# Altium PCB PCB.PcbDoc
Units mm, origin at the board's own origin, x right, y up, seen from the top; angles counter-clockwise.
Board outline 81.15 x 38.73 mm, 2 copper layers (Top Layer, Bottom Layer); 25 components, 20 nets, 91 pads, 0 vias.
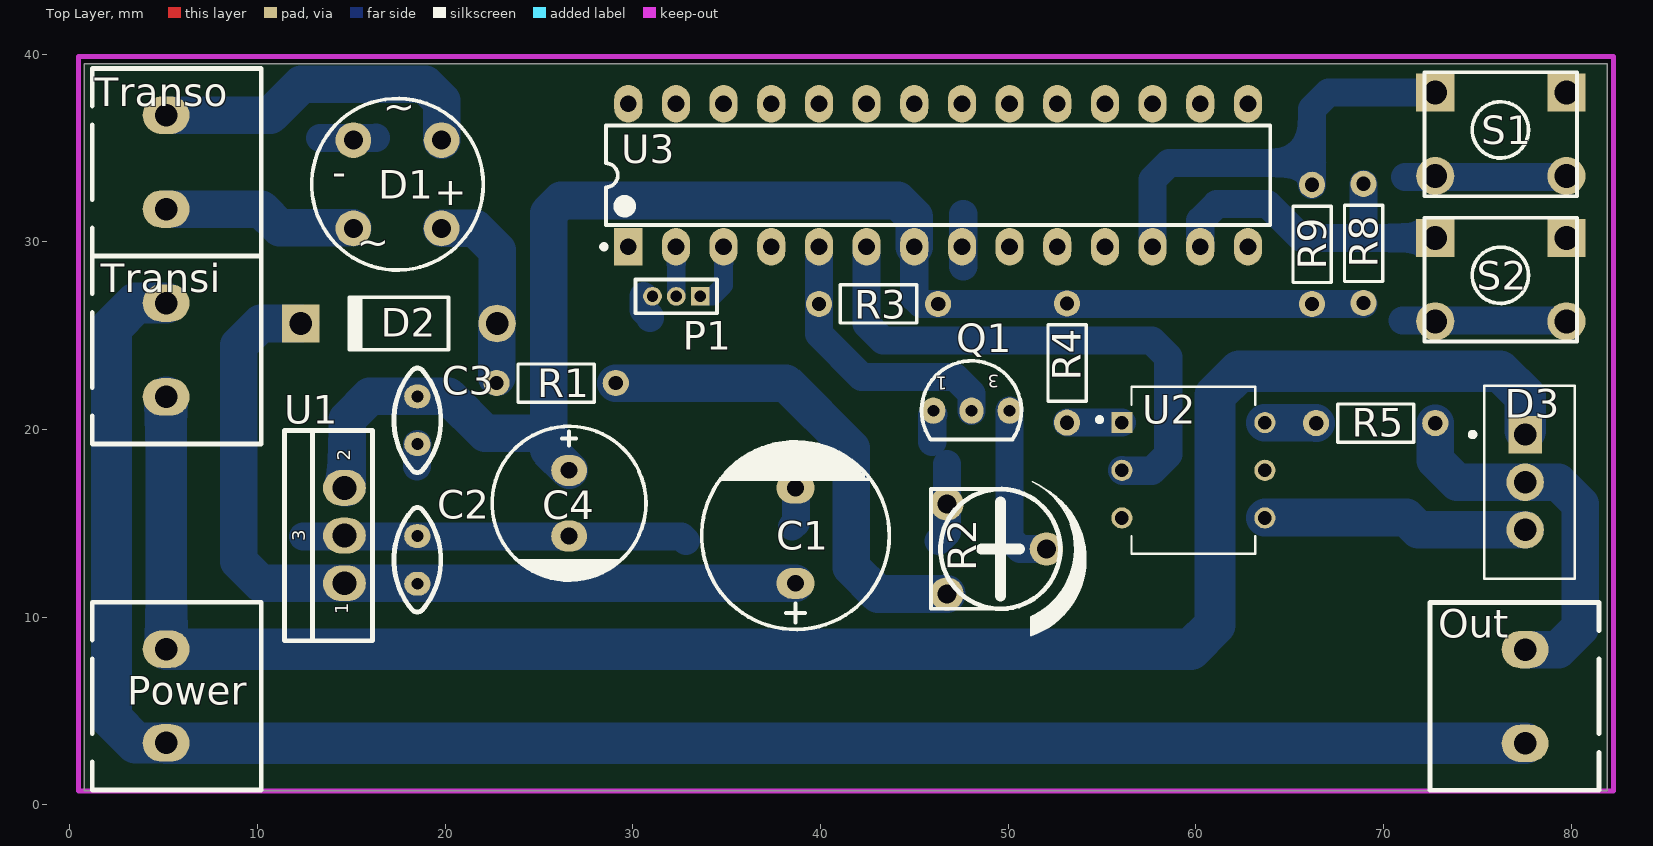
[diagram p0: Top Layer view]
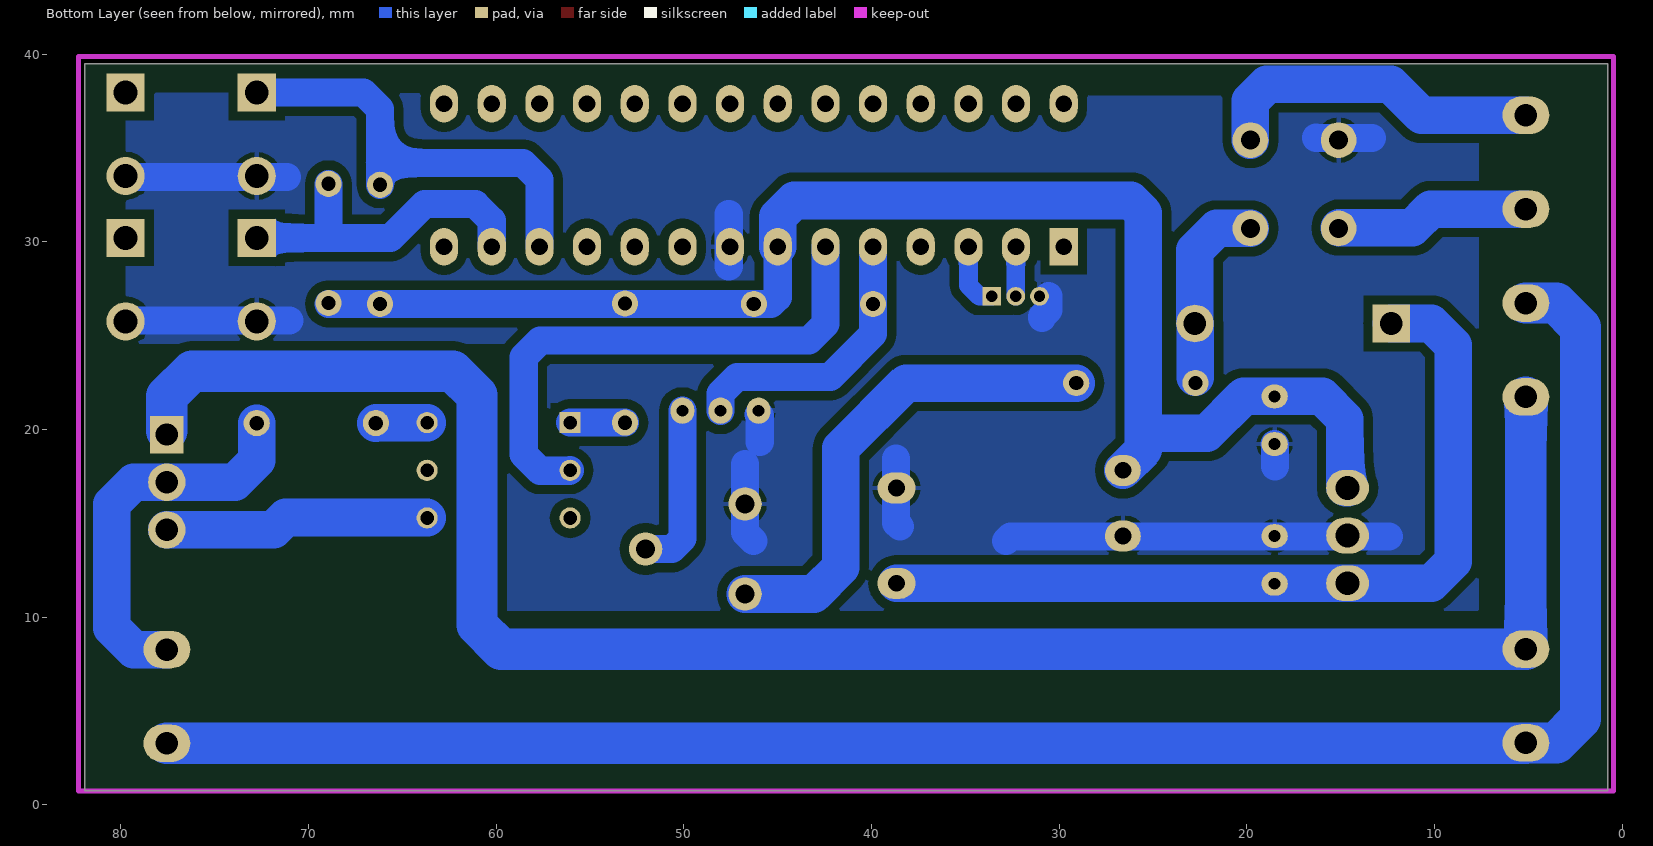
[diagram p1: Bottom Layer view, seen from below]
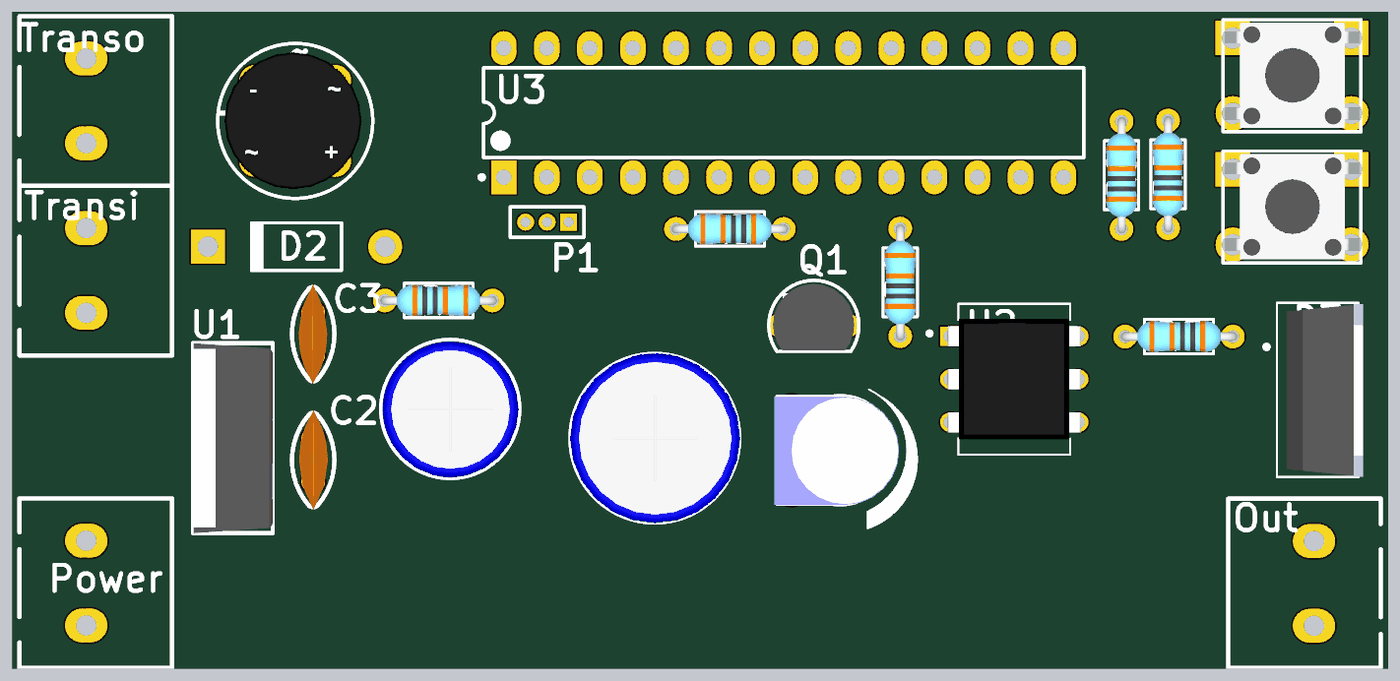
[diagram p2: 3D render of the assembled board from above, using the file's embedded part models]

## Layer stack, top to bottom
Top Solder: solder mask 0.0102, Solder Resist, Dk 3.5
Top Layer: signal copper 0.0356
Dielectric 1: dielectric 0.32, FR-4, Dk 4.8
Bottom Layer: signal copper 0.0356
Bottom Solder: solder mask 0.0102, Solder Resist, Dk 3.5

## Board outline
0.762,39.497 0.762,0.762 81.915,0.762 81.915,39.497

## Design rules (kind name [scope] priority, off if disabled: settings)
Clearance [All] p1: gap=0.5 ignorepadtopadclearanceinfootprint=FALSE
PolygonConnect [All] p1: connectstyle=Relief reliefconductorwidth=0.254 reliefentries=4 polygonreliefangle="90 Angle" airgapwidth=0.254
RoutingVias [All] p1: holewidth=0.711 width=1.27 viastyle="Through Hole" minholewidth=0.711 minwidth=1.27 maxholewidth=0.711 maxwidth=1.27
SolderMaskExpansion [All] p1: expansion=0.102 istentingtop=FALSE
Width [All] p1: maxlimit=1.5 minlimit=1.5 preferedwidth=1.5
30 further rules are at their usual default settings.

## Components (designator, comment, footprint, x,y, rotation, side; value= is the part's Value field where it differs from the comment)
C1 "1000uF" "cap 04" 38.659,14.351 r270 top
C2 "100nF" "Cap - 100nF" 18.51,13.056 r90 top
C3 "100nF" "Cap - 100nF" 18.51,20.498 r270 top
C4 "100uF" "cap 03" 26.594,16.076 r90 top
D1 "Diode Bridge" Bridge 17.45,33.071 r180 top
D2 "Diode 1N4007" DO-41 17.526,25.654 r180 top
D3 "BTA16" *TO254P1028X482X1968-3 77.54,19.736 r270 top
Out "Terminal" "Terminal 1*2" 81.477,0.787 r90 top
P1 "MHDR1X3" MHDR1X3 33.579,27.102 r180 top
Power "Terminal" "Terminal 1*2" 1.187,10.795 r270 top
Q1 "BC639" C945 48.038,21.006 r180 top
R1 "2.2K" Res-(1/4) 25.908,22.479 r0 top
R2 "10K" "Pot 00" 49.378,13.64 r270 top
R3 "10K" Res-(1/4) 43.085,26.695 r180 top
R4 "36" Res-(1/4) 53.13,23.546 r90 top
R5 "270" Res-(1/4) 69.577,20.345 r180 top
R8 "10K" Res-(1/4) 68.929,29.921 r90 top
R9 "10K" Res-(1/4) 66.186,29.87 r90 top
S1 "Switch PB" "Switch - Push to On" 76.244,35.738 r0 top
S2 "Switch PB" "Switch - Push to On" 76.244,27.991 r0 top
Transi "Terminal" "Terminal 1*2" 1.187,29.235 r270 top
Transo "Terminal" "Terminal 1*2" 1.187,39.247 r270 top
U1 "L7805" 78XXCV 14.624,14.351 r90 top
U2 "MOC3021" *DIP762W45P254L889H508Q6 59.861,17.831 r0 top
U3 "ATmega8" 28P3 46.26,33.553 r90 top

## Footprints (in the part's own frame and the unit in brackets; to place one, negate y for a bottom-side part, rotate by r counter-clockwise, add the part's x,y. Pads: shape width x height; smd on the part's side, far side on the other; paste and mask are expansions set on the pad)
28P3 [mm] "DIP, 28-Leads, Row Spacing 7.62mm, Pitch 2.54mm, Body 34.67x7.3mm"
  rect 2x1.5 hole 0.9: 1(-3.81,16.51)
  oval 2x1.5 hole 0.9: 2(-3.81,13.97) 3(-3.81,11.43) 4(-3.81,8.89) 5(-3.81,6.35) 6(-3.81,3.81) 7(-3.81,1.27) 8(-3.81,-1.27) 9(-3.81,-3.81) 10(-3.81,-6.35) 11(-3.81,-8.89) 12(-3.81,-11.43) 13(-3.81,-13.97) 14(-3.81,-16.51) 15(3.81,-16.51) 16(3.81,-13.97) 17(3.81,-11.43) 18(3.81,-8.89) 19(3.81,-6.35) 20(3.81,-3.81) 21(3.81,-1.27) 22(3.81,1.27) 23(3.81,3.81) 24(3.81,6.35) 25(3.81,8.89) 26(3.81,11.43) 27(3.81,13.97) 28(3.81,16.51)
  silkscreen extent -3.93,-17.7 2.65,17.93, body extent -3.6,-17.65 3.6,17.65, height 4.58
78XXCV [mil]
  oval 75x90 hole 50: 1(-100,0) 2(100,0) 3(0,0)
  silkscreen extent -221,-59 221,126, body extent -221,-59 221,126, height 781
*DIP762W45P254L889H508Q6 [mm]
  rect 1.13x1.13 hole 0.73: 1(-3.81,2.54)
  round 1.13 hole 0.73: 2(-3.81,0) 3(-3.81,-2.54) 4(3.81,-2.54) 5(3.81,0) 6(3.81,2.54)
  silkscreen extent -5.12,-4.45 3.3,4.45, body extent -3.94,-3.56 3.94,3.56, height 4.59
*TO254P1028X482X1968-3 [mm]
  rect 2x1.792 hole 1.19: 1(0,0)
  round 2 hole 1.19: 2(2.54,0) 3(5.08,0)
  silkscreen extent -2.6,-2.9 7.68,2.64, body extent -2.54,-1.61 7.66,2.88, height 19.31
Bridge [mm]
  round 1.905 hole 1.016: 1(-2.35,2.35) 2(-2.35,-2.35) 3(2.35,-2.35) 4(2.35,2.35)
  silkscreen extent -4.57,-4.57 4.57,4.57, body extent -3.92,-4.06 4.18,4.04, height 5.21
C945 [mil] "NPN Transistor"
  oval 50x55 hole 25: 1(80,0) 2(0,0) 3(-80,0)
  silkscreen extent -105,-105 105,61, body extent -94,-96 95,58, height 315
"cap 03" [mil]
  oval 65x75 hole 35: 1(68.9,0) 2(-68.9,0)
  silkscreen extent -161,-161 161,161, body extent -159,-159 157,158, height 473
"cap 04" [mil]
  oval 65x80 hole 35: 1(100,0) 2(-100,0)
  silkscreen extent -197,-197 197,197, body extent -198,-197 198,199, height 513
"Cap - 100nF" [mil]
  oval 50x55 hole 25: 1(-50,0) 2(50,0)
  silkscreen extent -110,-49 110,49, body extent -115,-34 115,33, height 272
DO-41 [mm] "Diode, Axial; Body 5.2 x 2.7 mm (LxDia. max), Lead Dia. 0.86 mm (max)"
  round 2 hole 1.2: 1(-5.23,0)
  rect 2x2 hole 1.2: 2(5.23,0)
  silkscreen extent -2.65,-1.4 2.75,1.4
MHDR1X3 [mm] "Connector; Header; 3 Position"
  rect 1x1 hole 0.6: 1(0,0)
  round 1 hole 0.6: 2(1.27,0) 3(2.54,0)
  silkscreen extent -0.9,-0.9 3.44,0.9
"Pot 00" [mil]
  round 70 hole 40: 1(-94.49,-104.33) 2(94.49,-104.33) 3(0,104.33)
  silkscreen extent -141,-138 181,187, body extent -125,-144 127,145, height 183
Res-(1/4) [mil]
  round 55 hole 30: 1(-125,0) 2(125,0)
  silkscreen extent -80,-40 80,40, body extent -135,-36 135,36, height 115
"Switch - Push to On" [mil]
  rect 80x80 hole 50: 1(-137.5,87.5) 1(137.5,87.5)
  round 80 hole 50: 2(-137.5,-87.5) 2(137.5,-87.5)
  silkscreen extent -160,-130 160,130, body extent -155,-121 157,123, height 205
"Terminal 1*2" [mm]
  oval 2x2.5 hole 1.2: 1(2.493,3.937) 2(7.493,3.937)
  silkscreen extent 0,0 10,9

## Part data
C1 C4: library part Cap-Polar, "Polar Capacitor", Voltage=25V, Adding Date=1387/12/20, Designer="Saeid Jorablo", Organazation=ControTec
C2 C3: library part Cap-Bipolar, "Bipolar Capacitor", Voltage=100V, Adding Date=1387/12/20, Designer="Saeid Jorablo", Organazation=ControTec
D1: "Full Wave Diode Bridge", Company=E.P.I.L, Design Date=2011/11/02
D2: "1 Amp General Purpose Rectifier", Code_JEDEC=DO-204-AL, ComponentLink1Description="Manufacturer Link", ComponentLink1URL=http://www.fairchildsemi.com/, ComponentLink2Description=Datasheet, ComponentLink2URL=http://www.fairchildsemi.com/ds/1N%2F1N4001.pdf, DatasheetVersion=1998, LatestRevisionDate=17-Jul-2002, LatestRevisionNote="Re-released for DXP Platform.", PackageDescription="Diode, Axial; Body 5.2 x 2.7 mm (LxDia. max), Lead Dia. 0.86 mm (max)", PackageReference=DO-41, PackageVersion=Aug-1999, Published=8-Jun-2000, Publisher="Altium Limited"
D3: library part BTA16-600CW3G, "Thyristor TRIAC 600V 170A 3-Pin_3+Tab_ TO-220AB Tube", Package="TO-220 Littelfuse", Availability=Unavailable, MF="Littelfuse Inc.", MP=BTA16-600CW3G, Price=None, SnapEDA_Link=https://www.snapeda.com/parts/BTA16-600CW3G/Littelfuse%20Inc./view-part/?ref=snap
Out Power Transi Transo: library part "Terminal 1*2", "Terminal 2 Pin 250VAC 16A", ComponentLinkURL=www.picpars.com, Designer="Seyed Mohsen Ghasemain", E-mail=picpars@gmail.com
P1: "Header, 3-Pin", LatestRevisionDate=17-Jul-2002, LatestRevisionNote="Re-released for DXP Platform.", Publisher="Altium Limited"
Q1: library part C945, "NPN Transistor", Company="IPA CO", Designer="Saeid Jorablo", Last Update Time=2008/08/04
R1 R3 R4 R5 R8 R9: library part Resistor, "Resistor", Power="1/8 W", Tolerance=5%
R2: library part "Resistor Variable", "Variable Resistor", Adding Date=137/12/22, Company=ControTec, Designer="Saeid Jorablo"
S1 S2: "Push Button Switch"
U1: library part L78XXCV, "Fixed Voltage Regulator", Adding Date=1387/01/06, Company=ControTec, Designer="Saeid Jorablo"
U2: "Optoisolator Triac Output 5300Vrms 1 Channel 6-DIP", Package="DIP-6 Fujitsu", Availability=Unavailable, MF="ON Semiconductor", MP=MOC3021, Price=None, SnapEDA_Link=https://www.snapeda.com/parts/MOC3021/ON%20Semiconductor/view-part/1666329/?ref=snap
U3: library part ATmega8-16PC, "8-Bit AVR Microcontroller with 8K Bytes of In-System Programmable Flash Memory", Supplier Part Number 1=ATMEGA8-16PC-ND, ComponentLink1Description=Datasheet, ComponentLink1URL=http://www.atmel.com/dyn/resources/prod_documents/doc2486.pdf, ComponentLink2Description="Atmel.com Home", ComponentLink2URL=http://www.atmel.com, DatasheetVersion=2486H-AVR-09/02, PackageDescription="28-lead (0.300\"/7.62mm Wide) Plastic Dual Inline Package (PDIP)", PackageReference=28P3, PackageVersion="revB, Sep-2001", Published=17-Sep-2003, Publisher="Altium Limited", Supplier 1=Digi-Key, Supplier 2=Mouser, Supplier Part Number 2=556-ATMEGA8-16PC

## Nets (pads, with @x,y where several pads share a name; then routed paths per layer and width w, separated by ;. In a path a pad name is that pad's centre, name@x,y a point inside that pad or via, vN(x,y) a via of type N, cw(c..) or ccw(c..) an arc to the next point about the centre after c; other vN are vias at no path point)
12V_L: D1.4 Transo.2 | length 10.4
  Bottom Layer w1.5: D1.4@15.061,30.759 D1.4
  Bottom Layer w2: Transo.2 10.182,31.754 11.176,30.759 D1.4@15.061,30.759
12V_N: D1.2 Transo.1 | length 17.8
  Bottom Layer w2: Transo.1 10.681,36.754 12.319,38.391 18.921,38.391 19.8,37.513 D1.2
220V_L: Out.1 Power.2 Transi.1 | length 100.2
  Bottom Layer w2.2: Transi.1 3.506,26.742 2.218,25.454 2.218,4.591 3.506,3.302 Power.2 5.135,3.291 77.529,3.291 Out.1
220V_N: D3.1 Power.1 Transi.2 | length 101.5
  Bottom Layer w2.2: Transi.2 Power.1 59.722,8.302 61.011,9.591 61.011,21.825 62.3,23.114 76.2,23.114 77.54,21.774 D3.1@77.54,19.939
+5: C3.1 C4.1 R3.1 R4.2 R8.1 R9.1 U1.2 U3.7 | length 78.5
  Bottom Layer w1.5: U3.7 44.99,27.045 45.339,26.695 R3.1 53.13,26.695 R9.1 R8.1@68.929,26.695
  Bottom Layer w2: U1.2 14.72,16.891 14.767,16.939 14.767,20.555 15.98,21.768 20.168,21.768 22.123,19.812 25.502,19.812 ; C4.1 25.502,18.918 25.502,31.532 26.177,32.207 44.111,32.207 44.99,31.329 U3.7
Down: R8.2 S2.1@72.752,30.213 U3.13 | length 17.7
  Bottom Layer w1.5: U3.13 60.23,31.151 61.108,32.029 63.805,32.029 65.621,30.213 69.186,30.213 S2.1@72.752,30.213 ; 68.929,30.47 R8.2
GND: C1.2 C2.2 C3.2 C4.2 D1.3 P1.3 Q1.1 R2.1 S1.2 S2.2 U1.3 U3.8 | length 55.7
  Bottom Layer w1.5: 12.421,14.3 32.578,14.3 32.817,14.061 ; 13.335,35.535 16.287,35.535 16.3,35.548 ; 18.491,18.034 18.491,19.209 C3.2 ; P1.3@30.559,27.102 30.559,26.377 30.912,26.024 30.912,25.959 ; 38.481,14.834 38.684,15.037 38.684,18.466 ; 45.949,19.355 45.949,20.752 Q1.1@46.006,20.809 ; 46.279,14.072 46.736,14.529 46.736,18.161 ; 47.6,28.695 47.6,31.496 ; 71.018,25.806 79.699,25.806 79.737,25.768 ccw(c79.673,25.768) S2.2@79.673,25.832 ; 71.145,33.452 79.673,33.452 79.737,33.515 ccw(c79.699,33.515) S1.2@79.699,33.553
NetC1_1: C1.1 C2.1 D2.2 U1.1 | length 45.4
  Bottom Layer w2: D2.2 10.163,25.654 8.992,24.482 8.992,12.983 10.163,11.811 U1.1 C1.1
NetD1_1: D1.1 D2.1 R1.1 | length 10.2
  Bottom Layer w2: D1.1 21.584,30.721 22.756,29.549 D2.1 22.733,25.631 R1.1@22.733,22.784
NetD3_2: D3.2 Out.2 R5.1 | length 20.7
  Bottom Layer w2: R5.1 72.752,18.367 73.924,17.196 D3.2 79.305,17.196 80.477,16.024 80.477,9.452 79.305,8.28 Out.2
NetD3_3: D3.3 U2.4 | length 14.2
  Bottom Layer w2: U2.4 63.697,15.316 71.196,15.316 71.857,14.656 D3.3
NetP1_1: P1.1 U3.3 | length 3.5
  Bottom Layer w1: P1.1 34.244,27.102 34.83,27.688 U3.3
NetP1_2: P1.2 U3.2 | length 2.6
  Bottom Layer w1: U3.2 32.309,29.724 P1.2
NetQ1_3: Q1.3 R2.3 | length 9
  Bottom Layer w1.5: Q1.3 50.07,14.192 50.622,13.64 R2.3
NetR1_2: R1.2 R2.2 | length 26
  Bottom Layer w2: R1.2 38.151,22.479 41.631,18.999 41.631,12.669 43.06,11.24 R2.2
NetR4_1: R4.1 U2.1 | length 2.9
  Bottom Layer w1.5: R4.1 U2.1
NetR5_2: R5.2 U2.6 | length 2.7
  Bottom Layer w2: U2.6 66.377,20.371 R5.2
Pulse: U2.2 U3.6 | length 28.9
  Bottom Layer w1.5: U3.6 42.45,25.618 43.328,24.74 57.643,24.74 58.522,23.861 58.522,18.684 57.643,17.805 56.077,17.805 U2.2
Trig: Q1.2 R3.2 U3.5 | length 15
  Bottom Layer w1.5: U3.5 R3.2 39.91,25.089 42.189,22.809 47.159,22.809 48.038,21.931 Q1.2
Up: R9.2 S1.1@72.752,37.96 U3.12 | length 23.4
  Bottom Layer w1.5: U3.12 57.69,33.335 58.568,34.214 66.186,34.214 ; R9.2 66.186,34.214 ; S1.1@72.752,37.96 67.065,37.96 66.186,37.082 66.186,34.214
pads on no net: S1.1@79.737,37.96 S2.1@79.737,30.213 U2.3 U2.5 U3.1 U3.4 U3.9 U3.10 U3.11 U3.14 U3.15 U3.16 U3.17 U3.18 U3.19 U3.20 U3.21 U3.22 U3.23 U3.24 U3.25 U3.26 U3.27 U3.28

## Polygon pours and split planes (outlines as drawn)
GND on Bottom Layer "GND_L02_P003" (solid, pour order 3): 79.737,37.96 79.737,24.562 59.411,24.562 59.411,10.338 7.696,10.338 7.645,10.389 7.645,37.744
GND on Bottom Layer "GND_L02_P001" (solid, pour order 1): 79.737,37.96
GND on Bottom Layer "GND_L02_P000" (solid, pour order 0): 79.737,37.96

## Keep-outs
Keep-Out Layer:
  lines w0.254: 0.457,0.737 82.245,0.737 82.245,39.878 0.457,39.878 0.457,0.737

## Text inside footprints (layer, text, board x,y; h text height)
D1: Top Overlay "~" at 17.018,30.582 h1.5 r180; Top Overlay "~" at 18.392,37.785 h1.5 r180; Top Overlay "+" at 21.148,33.223 h1.5 r180; Top Overlay "-" at 14.727,34.125 h1.5 r180
Q1: Top Overlay "1" at 46.742,22.816 h0.7 r180; Top Overlay "3" at 49.511,22.911 h0.7 r180
U1: Top Overlay "1" at 14.824,10.151 h0.7 r90; Top Overlay "2" at 14.924,18.351 h0.7 r90; Top Overlay "3" at 12.524,14.051 h0.7 r90